# Altium PCB power_path_control_switchable.PcbDoc
Units mm, origin at the board's own origin, x right, y up, seen from the top; angles counter-clockwise.
Board outline 16 x 10.25 mm, 2 copper layers (Top Layer, Bottom Layer); 15 components, 9 nets, 45 pads, 24 vias.
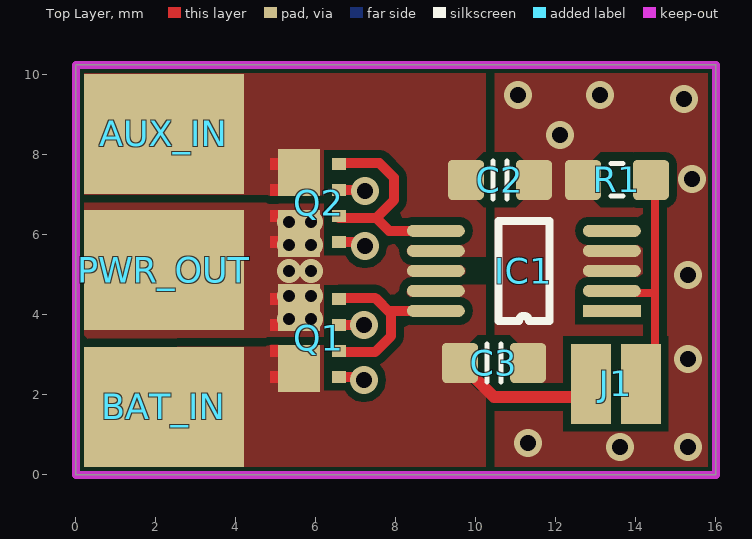
[diagram p0: Top Layer view]
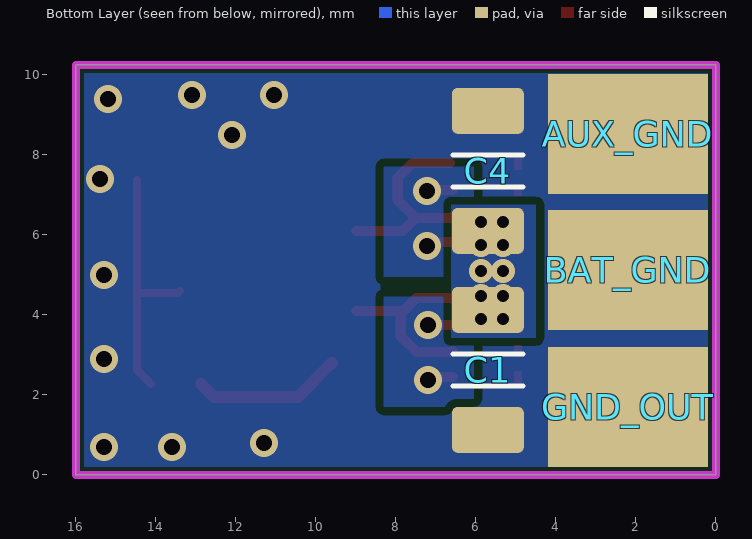
[diagram p1: Bottom Layer view, seen from below]

## Layer stack, top to bottom
Top Solder: solder mask 0.0102, Solder Resist, Dk 3.5
Top Layer: signal copper 0.0356
Dielectric 1: dielectric 0.32, FR-4, Dk 4.8
Bottom Layer: signal copper 0.0356
Bottom Solder: solder mask 0.0102, Solder Resist, Dk 3.5

## Board outline
0,0 16,0 16,10.25 0,10.25

## Design rules (kind name [scope] priority, off if disabled: settings)
BoardOutlineClearance [All] p1: gap=0.2 ignorepadtopadclearanceinfootprint=FALSE
Clearance ClearanceKeepOut [All vs OnLayer('Keep-Out Layer')] p1: gap=0.1 ignorepadtopadclearanceinfootprint=FALSE
Clearance [All] p2: gap=0.2 ignorepadtopadclearanceinfootprint=FALSE
ComponentClearance NetTieClearance [HasFootprint('NET-TIE-0602')] p1: gap=0 collisioncheckmode=3 verticalgap=0 showdistances=FALSE
ComponentClearance [All] p2: gap=0.2 collisioncheckmode=3 verticalgap=0.2 showdistances=FALSE
DiffPairsRouting [All] p1: maxlimit=0.3 minlimit=0.2 mostfreqgap=0.2 toplayer_minwidth=0.2 toplayer_maxwidth=1 toplayer_prefwidth=0.3 bottomlayer_minwidth=0.2 bottomlayer_maxwidth=1 bottomlayer_prefwidth=0.3 maxuncoupledlength=12.7
HoleSize [All] p1: absolutevalues=TRUE maxlimit=5 minlimit=0.3 maxpercent=80.000 minpercent=20.000
HoleToHoleClearance [All] p1: gap=0.2 allowstackedmicrovias=TRUE
MinimumSolderMaskSliver [All] p1: minsoldermaskwidth=0.2
PolygonConnect DirectConnectPolygons [All vs IsNamedPolygon('Power 16V') or IsNamedPolygon('Power GND') or IsNamedPolygon('Driver 16V') or InNet('SL_A') or InNet('SL_B') or InNet('SL_C') or InNet('MOT_A') or InNet('MOT_B') or InNet('MOT_C') or InNet('BAT_GND') or InNet('16V') or InNet('SLA_SHUNT') or InNet('SLB_SHUNT') or InNet('SLC_SHUNT')] p1: connectstyle=Direct reliefconductorwidth=0.254 reliefentries=4 polygonreliefangle="90 Angle" airgapwidth=0.254
PolygonConnect [All] p2: connectstyle=Direct reliefconductorwidth=0.254 reliefentries=4 polygonreliefangle="90 Angle" airgapwidth=0.254
RoomDefinition power_path_control_switchable [InComponentClass('power_path_control_switchable')] p1: confinementstyle=ConfineIn formatcopy=TRUE lockcomponents=FALSE outline -25.4,-25.4 75.9,-25.4 75.9,42.3 -25.4,42.3
RoutingVias [All] p1: holewidth=0.3 width=0.6 viastyle="Through Hole" minholewidth=0.3 minwidth=0.6 maxholewidth=2 maxwidth=3
SolderMaskExpansion SolderMaskExpansionVia [IsVia And (Not IsTestpoint)] p1: expansion=-5
SolderMaskExpansion [All] p2: expansion=0.1
Width [All] p1: maxlimit=5 minlimit=0.2 preferedwidth=0.2 minimp=50.000000 maximp=50.000000 favimp=50.000000
25 further rules are at their usual default settings.

## Components (designator, comment, footprint, x,y, rotation, side; value= is the part's Value field where it differs from the comment)
AUX_GND "HEADER-1" POWER-PAD-4x3#1 2.2,8.55 r180 bottom
AUX_IN "HEADER-1" POWER-PAD-4x3#2 2.2,8.525 r0 top
BAT_GND "HEADER-1" POWER-PAD-4x3#2 2.2,5.125 r0 bottom
BAT_IN "HEADER-1" POWER-PAD-4x3#2 2.2,1.7 r180 top
C1 "10uF, 25V" CAPC3216X180N 5.7,2.625 r270 bottom value=10uF
C2 "100n" CAPC1608X90N 10.6,7.375 r0 top value=10n
C3 "100n" CAPC1608X90N 10.45,2.8 r0 top value=10n
C4 "10uF, 25V" CAPC3216X180N 5.7,7.6 r90 bottom value=10uF
GND_OUT "HEADER-1" POWER-PAD-4x3#2 2.2,1.7 r180 bottom
IC1 "LTC4416" MSOP-10 11.2,5.1 r180 top
J1 "SWITCH" PADS-2-1020 14.125,2.275 r180 top
PWR_OUT "HEADER-1" POWER-PAD-4x3#2 2.2,5.125 r180 top
Q1 "SI5997DU" POWERPAK-CHIPFET-DUAL 6.75,3.425 r270 top
Q2 "SI5997DU" POWERPAK-CHIPFET-DUAL 6.75,6.8 r270 top
R1 "Thick Film" RESC1608X55N 13.525,7.375 r180 top value=100k

## Footprints (in the part's own frame and the unit in brackets; to place one, negate y for a bottom-side part, rotate by r counter-clockwise, add the part's x,y. Pads: shape width x height; smd on the part's side, far side on the other; paste and mask are expansions set on the pad)
CAPC1608X90N [mm] "Chip Capacitor, Body 1.6x0.8mm, EIA 0603, IPC Medium Density"
  round 0.254 on Mech15: 0(0,0)
  rrect25% 0.9x1 smd: 1(-0.85,0) 2(0.85,0)
  Top Layer pour cut-out: -0.6,0.5 -0.4,0.7 0.4,0.7 0.6,0.5 0.6,-0.5 0.4,-0.7 -0.4,-0.7 -0.6,-0.5
  silkscreen extent -0.18,-0.48 0.18,0.48, body extent -0.85,-0.45 0.85,0.45, height 0.89
CAPC3216X180N [mm] "Chip Capacitor, Body 3.2x1.6mm, 1.8mm H, EIA 1206, IPC Medium Density"
  round 0.508 on Mech15: 0(0,0)
  rrect25% 1.15x1.8 smd: 1(-1.5,0) 2(1.5,0)
  silkscreen extent -0.4,-0.88 0.4,0.88, body extent -1.7,-0.9 1.7,0.9, height 1.8
MSOP-10 [mm]
  rect 1.45x0.3 smd: 1(-2.2,1)
  oval 1.45x0.3 smd: 2(-2.2,0.5) 3(-2.2,0) 4(-2.2,-0.5) 5(-2.2,-1) 6(2.2,-1) 7(2.2,-0.5) 8(2.2,0) 9(2.2,0.5) 10(2.2,1)
  silkscreen extent -0.64,-1.25 0.64,1.25, body extent -2.47,-1.5 2.43,1.5, height 1.15
PADS-2-1020 [mm]
  rect 1x2 smd: 1(0,0) 2(1.25,0)
POWER-PAD-4x3#1 [mm]
  rect 4x3 smd: 1(0,-0.025)
POWER-PAD-4x3#2 [mm]
  rect 4x3 smd: 1(0,0)
POWERPAK-CHIPFET-DUAL [mm]
  rect 1.175x1.05 smd: D1(0.763,-1.175) D2(-0.763,-1.175)
  rect 0.3x0.35 smd: G1(0.325,-0.175) G2(-0.975,-0.175) S1(0.975,-0.175) S2(-0.325,-0.175)
  Top Layer region: 0.825,-1.9 1.125,-1.9 1.125,-1.7 0.825,-1.7
  Top Layer region: 0.175,-1.9 0.475,-1.9 0.475,-1.7 0.175,-1.7
  Top Layer region: -0.475,-1.9 -0.175,-1.9 -0.175,-1.7 -0.475,-1.7
  Top Layer region: -1.125,-1.9 -0.825,-1.9 -0.825,-1.7 -1.125,-1.7
  body extent -1.5,-1.9 1.5,0, height 0.75
RESC1608X55N [mm] "Chip Resistor, Body 1.6x0.8mm, EIA 0603, IPC Medium Density"
  round 0.254 on Mech15: 0(0,0)
  rrect25% 0.9x1 smd: 1(-0.85,0) 2(0.85,0)
  Top Layer pour cut-out: -0.6,0.5 -0.4,0.7 0.4,0.7 0.6,0.5 0.6,-0.5 0.4,-0.7 -0.4,-0.7 -0.6,-0.5
  silkscreen extent -0.15,-0.41 0.15,0.41, body extent -0.87,-0.47 0.88,0.48, height 0.54

## Part data
C1 C4: library part CAPC_6n8_1206_NP0_50V, "Capacitor SMD Cer 6.8nF 5% 50V NP0 1206", Manufacturer 1="TDK Corporation", Manufacturer Part Number 1=C3216C0G1H682J/0.60, Package / Case="1206 (3216 metric)", Ratings=25V, Supplier Part Number 1=445-4005-1-ND, Tolerance=±5%, Material="Ceramic NP0", SCDType=spec, Supplier 1=Digi-Key
C2 C3: library part CAPC_10n_0603_X7R_50V_10%, "Capacitor SMD Cer 10nF 10% 50V X7R 0603", Manufacturer 1="TDK Corporation", Manufacturer 2="AVX Corporation", Manufacturer Part Number 1=C1608X7R1H103K, Manufacturer Part Number 2=06035C103KAT2A, Package / Case="0603 (1608 metric)", Ratings="50V; X7R", Supplier Part Number 1=445-1311-1-ND, Tolerance=±10%, ComponentLink1Description=http://product.tdk.com/capacitor/mlcc/en/documents/mlcc_commercial_general_en.pdf, ComponentLink1URL=http://product.tdk.com/capacitor/mlcc/en/documents/mlcc_commercial_general_en.pdf, ComponentLink2Description=http://www.avx.com/docs/Catalogs/cx7r.pdf, ComponentLink2URL=http://www.avx.com/docs/Catalogs/cx7r.pdf, Material=ceramic, SCDType=spec, Supplier 1=Digi-Key, Supplier 2=Digi-Key, Supplier Part Number 2=478-1227-1-ND
IC1: "PowerPath Controller, 3.6-36V, MSOP-10, LTC4416, Linear Technology", Case/Package=MSOP-10, Manufacturer="Analog Devices / Linear Technology", Manufacturer Part Number=LTC4416EMS#PBF, Operating Temperature Range="-40°C .. 85°C", Supplier Part Number 1=584-LTC4416EMS#PBF, Supply Voltage Range="3.6V .. 36V", ComponentLink4Description=Datasheet, ComponentLink4URL=https://datasheet.ciiva.com/1960/17899-1960765.pdf, Number of Drivers=2, Supplier 1=Mouser, Supplier 2=TME, Supplier Part Number 2=LTC4416EMSPBF
J1: library part HEADER-2
Q1 Q2: "MOSFET, DUAL P-CHANNEL, 30Vin, 6A, 0.054R, SI5997DU-T1-GE3, PowerPAK ChipFET Dual", Continuous Drain Current (ID)=5.1A, Drain to Source Voltage (Vdss)=-30V, Gate to Source Voltage (Vgs)=20V, Manufacturer="Vishay Siliconix", Manufacturer Part Number=SI5997DU-T1-GE3, Max Power Dissipation=10.4W, Power Dissipation=2.3W, Supplier Part Number 1=2056727, Threshold Voltage=-1.2V, ComponentLink1Description=Datasheet, ComponentLink1URL=https://datasheet.ciiva.com/11159/si5997du-11159553.pdf, Element Configuration=Dual, Rds On Max=54mR, Supplier 1=Farnell, Supplier 2=Mouser, Supplier Part Number 2=78-SI5997DU-T1-GE3
R1: library part RES_100K_0603_1%, "Resistor SMD chip 100k Ohm 0.1W 1% 0603", Manufacturer 1=Vishay/Dale, Manufacturer Part Number 1=CRCW0603100KFKEA, Package / Case="0603 (2012 metric)", Ratings=1/10W, Supplier Part Number 1=541-100KHCT-ND, Tolerance=±1%, SCDType=spec, Supplier 1=Digi-Key

## Via types
v1: diameter 0.7, hole 0.4, Top Layer to Bottom Layer, 14 vias
v2: diameter 0.6, hole 0.3, Top Layer to Bottom Layer, 10 vias

## Nets (pads, with @x,y where several pads share a name; then routed paths per layer and width w, separated by ;. In a path a pad name is that pad's centre, name@x,y a point inside that pad or via, vN(x,y) a via of type N, cw(c..) or ccw(c..) an arc to the next point about the centre after c; other vN are vias at no path point)
AUX+: AUX_IN.1 C2.1 IC1.7 Q2.D2
BAT+: BAT_IN.1 C3.1 IC1.9 J1.2 Q1.D1 | length 3.8
  Top Layer w0.3: C3.1 10.454,1.946 12.546,1.946 J1.2
EN1: IC1.2 J1.1 R1.1 | length 6.3
  Top Layer w0.2: IC1.2 13.45,4.55 14.475,4.55 ; J1.1 14.475,2.625 14.475,4.55 ; R1.1@14.475,7.375 14.475,4.55
G1: IC1.10 Q1.G1 Q1.G2 | length 4.7
  Top Layer w0.254: Q1.G1 6.602,3.073 7.481,3.073 7.877,3.47 7.877,4.031 ; Q1.G2 6.602,4.427 7.481,4.427 7.877,4.031 ; IC1.10 7.877,4.1 7.877,4.031
G2: IC1.6 Q2.G1 Q2.G2 | length 5.3
  Top Layer w0.254: Q2.G1 6.575,6.425 6.943,6.425 6.945,6.423 7.506,6.423 ; Q2.G2@6.65,7.8 7.583,7.8 7.952,7.431 7.952,6.87 7.506,6.423 ; IC1.6 7.829,6.1 7.506,6.423
GND: AUX_GND.1 BAT_GND.1 C1.2 C2.2 C3.2 C4.2 GND_OUT.1 IC1.3 IC1.4 R1.2
  other v1: 13.6,0.7 15.3,0.7 11.3,0.8 15.3,2.9 15.3,5 15.4,7.4 12.1,8.5 15.2,9.4 11.05,9.5 13.1,9.5
NetQ1_S1: Q1.S1 Q1.S2 | length 1.5
  Top Layer w0.254: Q1.S1 7.175,2.45 v1@7.175,2.275 ; Q1.S2 7.05,3.75 v1(7.2,3.75)
  Bottom Layer w0.254: v1(7.2,3.75) v1@7.276,3.675
  other v1: 7.2,2.375
NetQ2_S1: Q2.S1 Q2.S2 | length 1.6
  Top Layer w0.254: Q2.S1 7.2,5.825 v1@7.2,5.7 ; Q2.S2 7.3,7.125 v1@7.3,7.2
  other v1: 7.225,5.725 7.225,7.1
PWR_OUT: C1.1 C4.1 IC1.8 PWR_OUT.1 Q1.D2 Q2.D1
  other v2: 5.325,3.9 5.875,3.9 5.325,4.475 5.875,4.475 5.325,5.1 5.875,5.1 5.325,5.75 5.875,5.75 5.325,6.325 5.875,6.325
pads on no net: C1.0 C2.0 C3.0 C4.0 IC1.1 IC1.5 R1.0

## Polygon pours and split planes (outlines as drawn)
GND on Bottom Layer "Bottom Layer-GND" (solid, remove dead copper, pour order 18): 0,0 0,10.25 16,10.25 16,0
PWR_OUT on Bottom Layer "Bottom Layer-PWR_OUT" (solid, remove dead copper, pour order 0): 4.5,3.429 6.618,3.429 6.618,6.75 4.5,6.75
NetQ2_S1 on Bottom Layer "Bottom Layer-NetQ2_S1" (solid, pour order 4): 6.05,4.95 6.05,7.7 8.3,7.7 8.3,4.95
NetQ1_S1 on Bottom Layer "Bottom Layer-NetQ1_S1" (solid, remove dead copper, pour order 2): 6.05,4.45 6.05,1.7 8.3,1.7 8.3,4.45
GND on Top Layer "Top Layer-GND" (solid, remove dead copper, pour order 16): 10.475,0 16,0 16,10.25 10.475,10.25
AUX+ on Top Layer "Top Layer-AUX+" (solid, remove dead copper, pour order 10): 0,10.25 10.25,10.25 10.25,5.45 0,5.45
BAT+ on Top Layer "Top Layer-BAT+" (solid, remove dead copper, pour order 14): 0,0 10.25,0 10.25,4.75 0,4.75
no net on Top Layer "Top Layer-No Net" (solid, pour order 12): 0,0
no net on Top Layer "Top Layer-No Net 1" (solid, pour order 8): 0,10.25
PWR_OUT on Top Layer "Top Layer-PWR_OUT" (solid, remove dead copper, pour order 6): 0,3.4 0,6.8 9.75,6.8 9.75,3.45

## Keep-outs
Keep-Out Layer:
  the board outline again, w0.2